# EAGLE board IT Kiosk Ventillátor vezérlő (EAGLE 9.7.0)

Size 622.56 x 163.41 mm. Coordinates in mm from the lower left corner, seen from the top.
Outline: 0,0 622.56,0 622.56,163.41 0,163.41 0,0
Copper layers (1*16): Top 0.035mm / dielectric 1.5mm / Bottom 0.035mm
Design rules "default": minimum track width 6mil, minimum drill 0.35mm, track to track 6mil, track to pad 6mil, pad to pad 6mil, via to via 6mil, smd to smd 6mil, copper to edge 40mil, drill to drill 6mil, minimum pad ring 10mil, minimum via ring 8mil, stop-mask expansion 4mil, vias tented up to drill 0mil, thermal gap 10mil

## Footprints (pad centres in the part's own frame; a part is rotated, then mirrored left to right if it is on the bottom)
LU-5-R = drill 0.8: 1 -6.35,-3.81; 5 3.81,-3.81; 6 6.35,-3.81; 7 6.35,3.81; 8 3.81,3.81; 12 -6.35,3.81
MOTOR = drill 1.118 pad 3.15 octagon: + 2.54,0; - -2.54,0
28027 = drill 1.016 long: 1 -2.54,0; 2 0,0; 3 2.54,0
RESAD1016W63L850D250B = drill 0.83 pad 1.43: 1 -5.08,0; 2 5.08,0
TO92 = drill 0.813 octagon: 1 -1.27,0; 2 0,1.905; 3 1.27,0
LCD-I2C = drill 1.016 long: 1 -19.05,-5.08; 2 -19.05,-7.62; 3 -19.05,-10.16; 4 -19.05,-12.7
ARDUINO-UNO-R3-SHIELD = drill 1.016 pad 1.88: 3.3V 24.13,-2.54; 5V 24.13,0; A0 24.13,12.7; A1 24.13,15.24; A2 24.13,17.78; A3 24.13,20.32; A4 24.13,22.86; A5 24.13,25.4; AREF -24.13,-13.97; D2 -24.13,20.32; D3 -24.13,17.78; D4 -24.13,15.24; D5 -24.13,12.7; D6 -24.13,10.16; D7 -24.13,7.62; D8 -24.13,3.81; D9 -24.13,1.27; D10 -24.13,-1.27; D11 -24.13,-3.81; D12 -24.13,-6.35; D13 -24.13,-8.89; GND@0 24.13,2.54; GND@1 24.13,5.08; GND@2 -24.13,-11.43; IOREF 24.13,-7.62; NC 24.13,-10.16; RES 24.13,-5.08; RX -24.13,25.4; SCL -24.13,-19.05; SDA -24.13,-16.51; TX -24.13,22.86; VIN 24.13,7.62

## Placement (x,y rotation side)
K3  RELAY-SPDT_LU-5-R  [LU-5-R]  563.42,98.38 180 top
M2  MOTOR_HDR  [MOTOR]  614.31,80.16 0 top
PIR1  PIR-SENSOR_28027  [28027]  486.22,98.54 0 top
R1  100  [RESAD1016W63L850D250B]  500.08,35.79 90 top
U1  TMP36GT9Z_TO92  [TO92]  382.57,4.83 0 top
U3  LCD-16X2-I2CSUNFOUNDER-IIC  [LCD-I2C]  397.29,128.97 0 top
U4  ARDUINO-UNO-R3-SHIELD  [ARDUINO-UNO-R3-SHIELD]  47.88,133.56 270 top
U5  LCD-16X2-I2CSUNFOUNDER-IIC  [LCD-I2C]  66.3,149.95 0 top
UVENTILLÁTOR_SZABÁLYZÓ  ARDUINO-UNO-R3-SHIELD  [ARDUINO-UNO-R3-SHIELD]  429.21,45.32 270 top

## Library data of the parts
K3 M2 PIR1 R1 U1 U3-U5 UVENTILLÁTOR_SZABÁLYZÓ = Tinkercad

## Nets
K3_COIL1: K3.5 R1.2
M2_+: K3.8 M2.+
U4_5V: U4.5V U5.2
U4_GND: U4.GND@0 U4.GND@1 U4.GND@2 U5.1
U4_SCL: U4.SCL U5.4
U4_SDA: U4.SDA U5.3
UVENTILLÁTOR_SZABÁLYZÓ_3.3V: U1.3 UVENTILLÁTOR_SZABÁLYZÓ.3.3V
UVENTILLÁTOR_SZABÁLYZÓ_5V: K3.7 K3.12 PIR1.2 U3.2 UVENTILLÁTOR_SZABÁLYZÓ.5V
UVENTILLÁTOR_SZABÁLYZÓ_A0: U1.2 UVENTILLÁTOR_SZABÁLYZÓ.A0
UVENTILLÁTOR_SZABÁLYZÓ_D3: PIR1.1 UVENTILLÁTOR_SZABÁLYZÓ.D3
UVENTILLÁTOR_SZABÁLYZÓ_D4: R1.1 UVENTILLÁTOR_SZABÁLYZÓ.D4
UVENTILLÁTOR_SZABÁLYZÓ_GND: K3.6 M2.- PIR1.3 U1.1 U3.1 UVENTILLÁTOR_SZABÁLYZÓ.GND@0 UVENTILLÁTOR_SZABÁLYZÓ.GND@1 UVENTILLÁTOR_SZABÁLYZÓ.GND@2
UVENTILLÁTOR_SZABÁLYZÓ_SCL: U3.4 UVENTILLÁTOR_SZABÁLYZÓ.SCL
UVENTILLÁTOR_SZABÁLYZÓ_SDA: U3.3 UVENTILLÁTOR_SZABÁLYZÓ.SDA

## Tracks (layer width: path | path; a pad name or v marks a point on that pad's centre or on a via)
K3_COIL1  (1 unrouted)
M2_+  (1 unrouted)
U4_5V  (1 unrouted)
U4_GND  (3 unrouted)
U4_SCL  (1 unrouted)
U4_SDA  (1 unrouted)
UVENTILLÁTOR_SZABÁLYZÓ_3.3V  (1 unrouted)
UVENTILLÁTOR_SZABÁLYZÓ_5V  (4 unrouted)
UVENTILLÁTOR_SZABÁLYZÓ_A0  (1 unrouted)
UVENTILLÁTOR_SZABÁLYZÓ_D3  (1 unrouted)
UVENTILLÁTOR_SZABÁLYZÓ_D4  (1 unrouted)
UVENTILLÁTOR_SZABÁLYZÓ_GND  (7 unrouted)
UVENTILLÁTOR_SZABÁLYZÓ_SCL  (1 unrouted)
UVENTILLÁTOR_SZABÁLYZÓ_SDA  (1 unrouted)